# Altium PCB TSDM_2017.PcbDoc
Units mm, origin at the board's own origin, x right, y up, seen from the top; angles counter-clockwise.
Board outline 48 x 43 mm, 2 copper layers (Top Layer, Bottom Layer); 13 components, 15 nets, 36 pads, 7 vias.
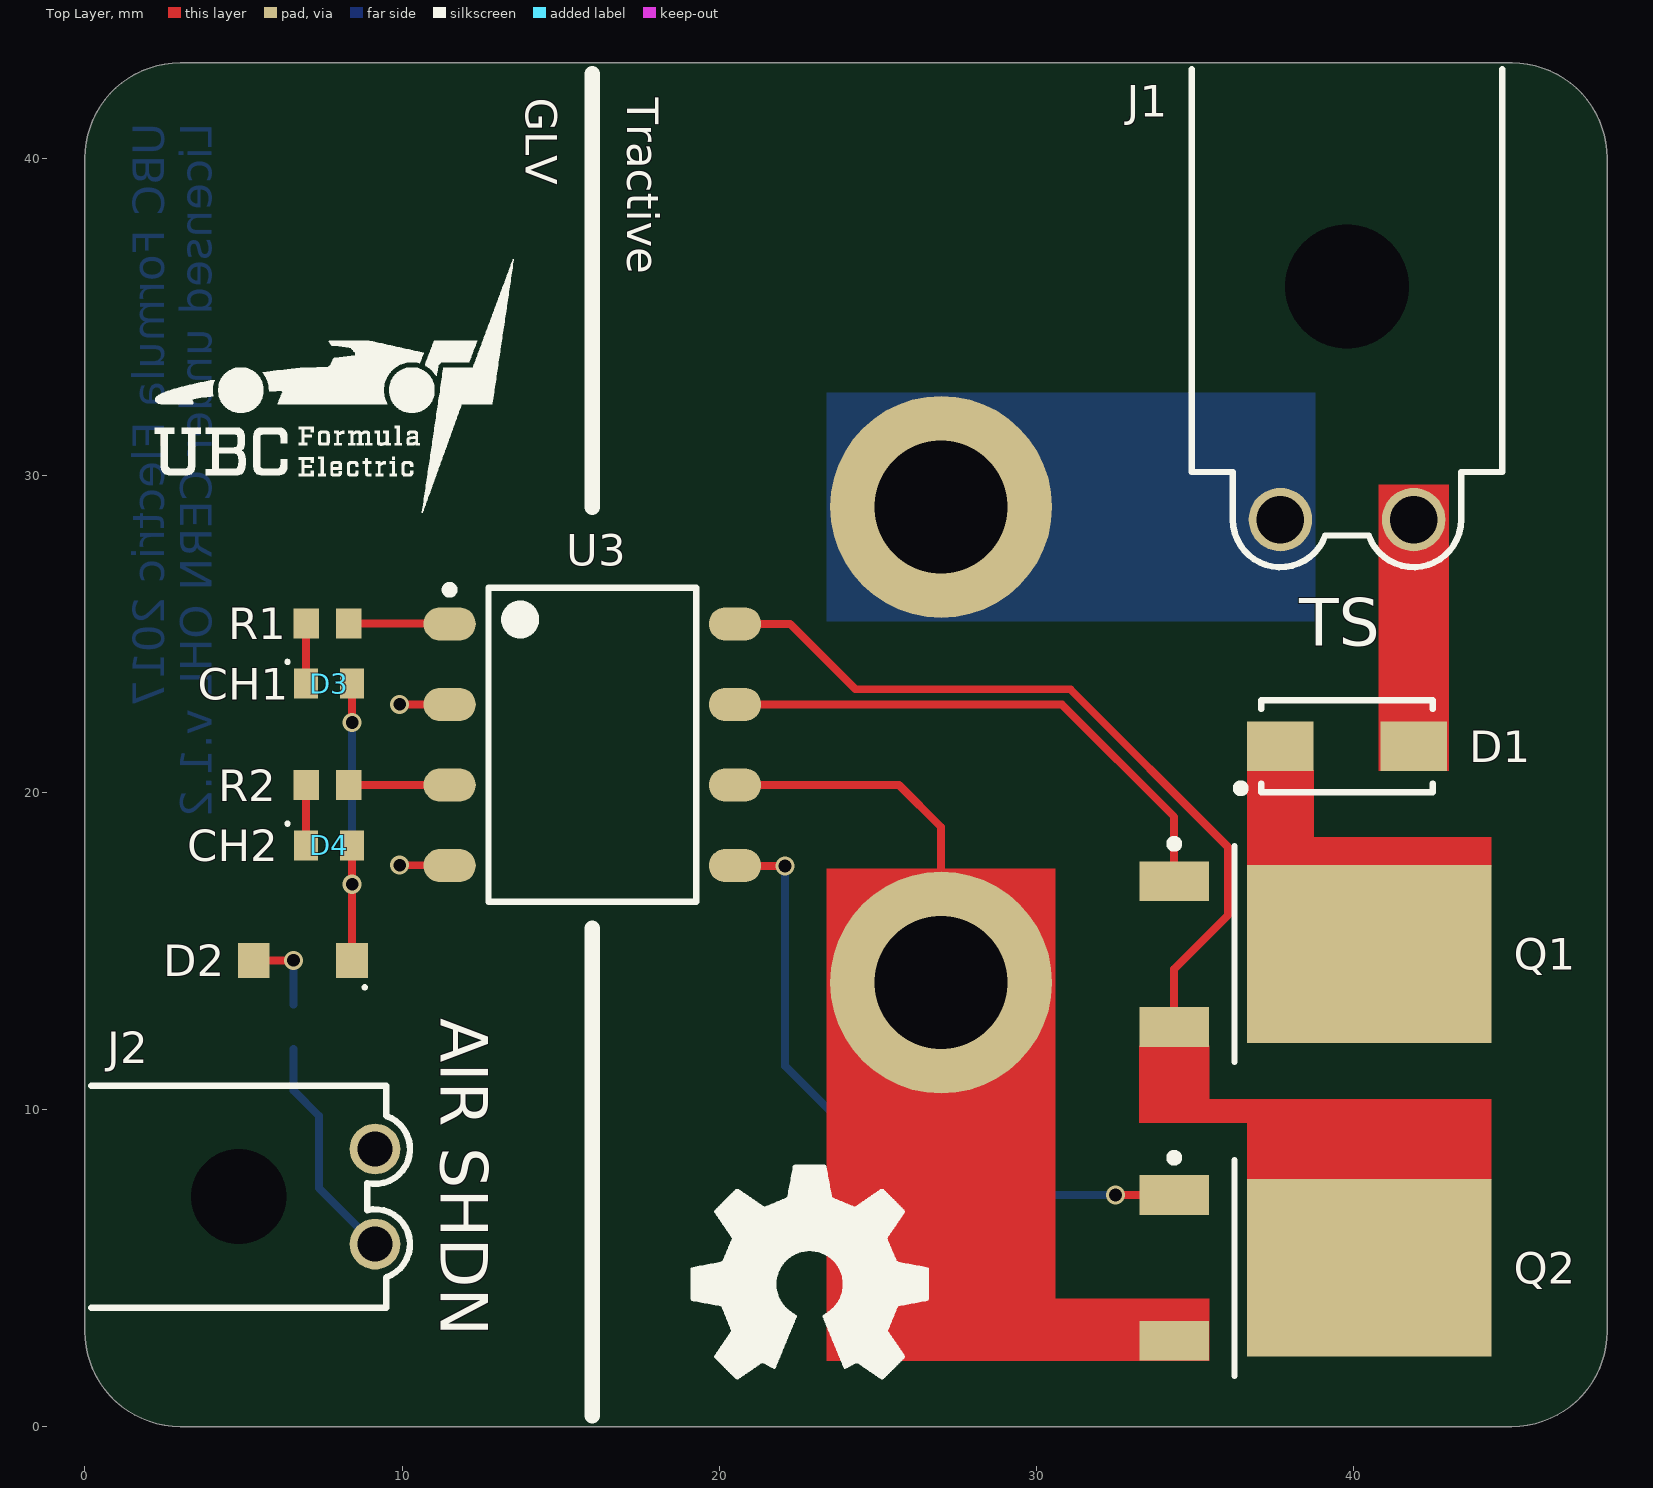
[diagram p0: Top Layer view]
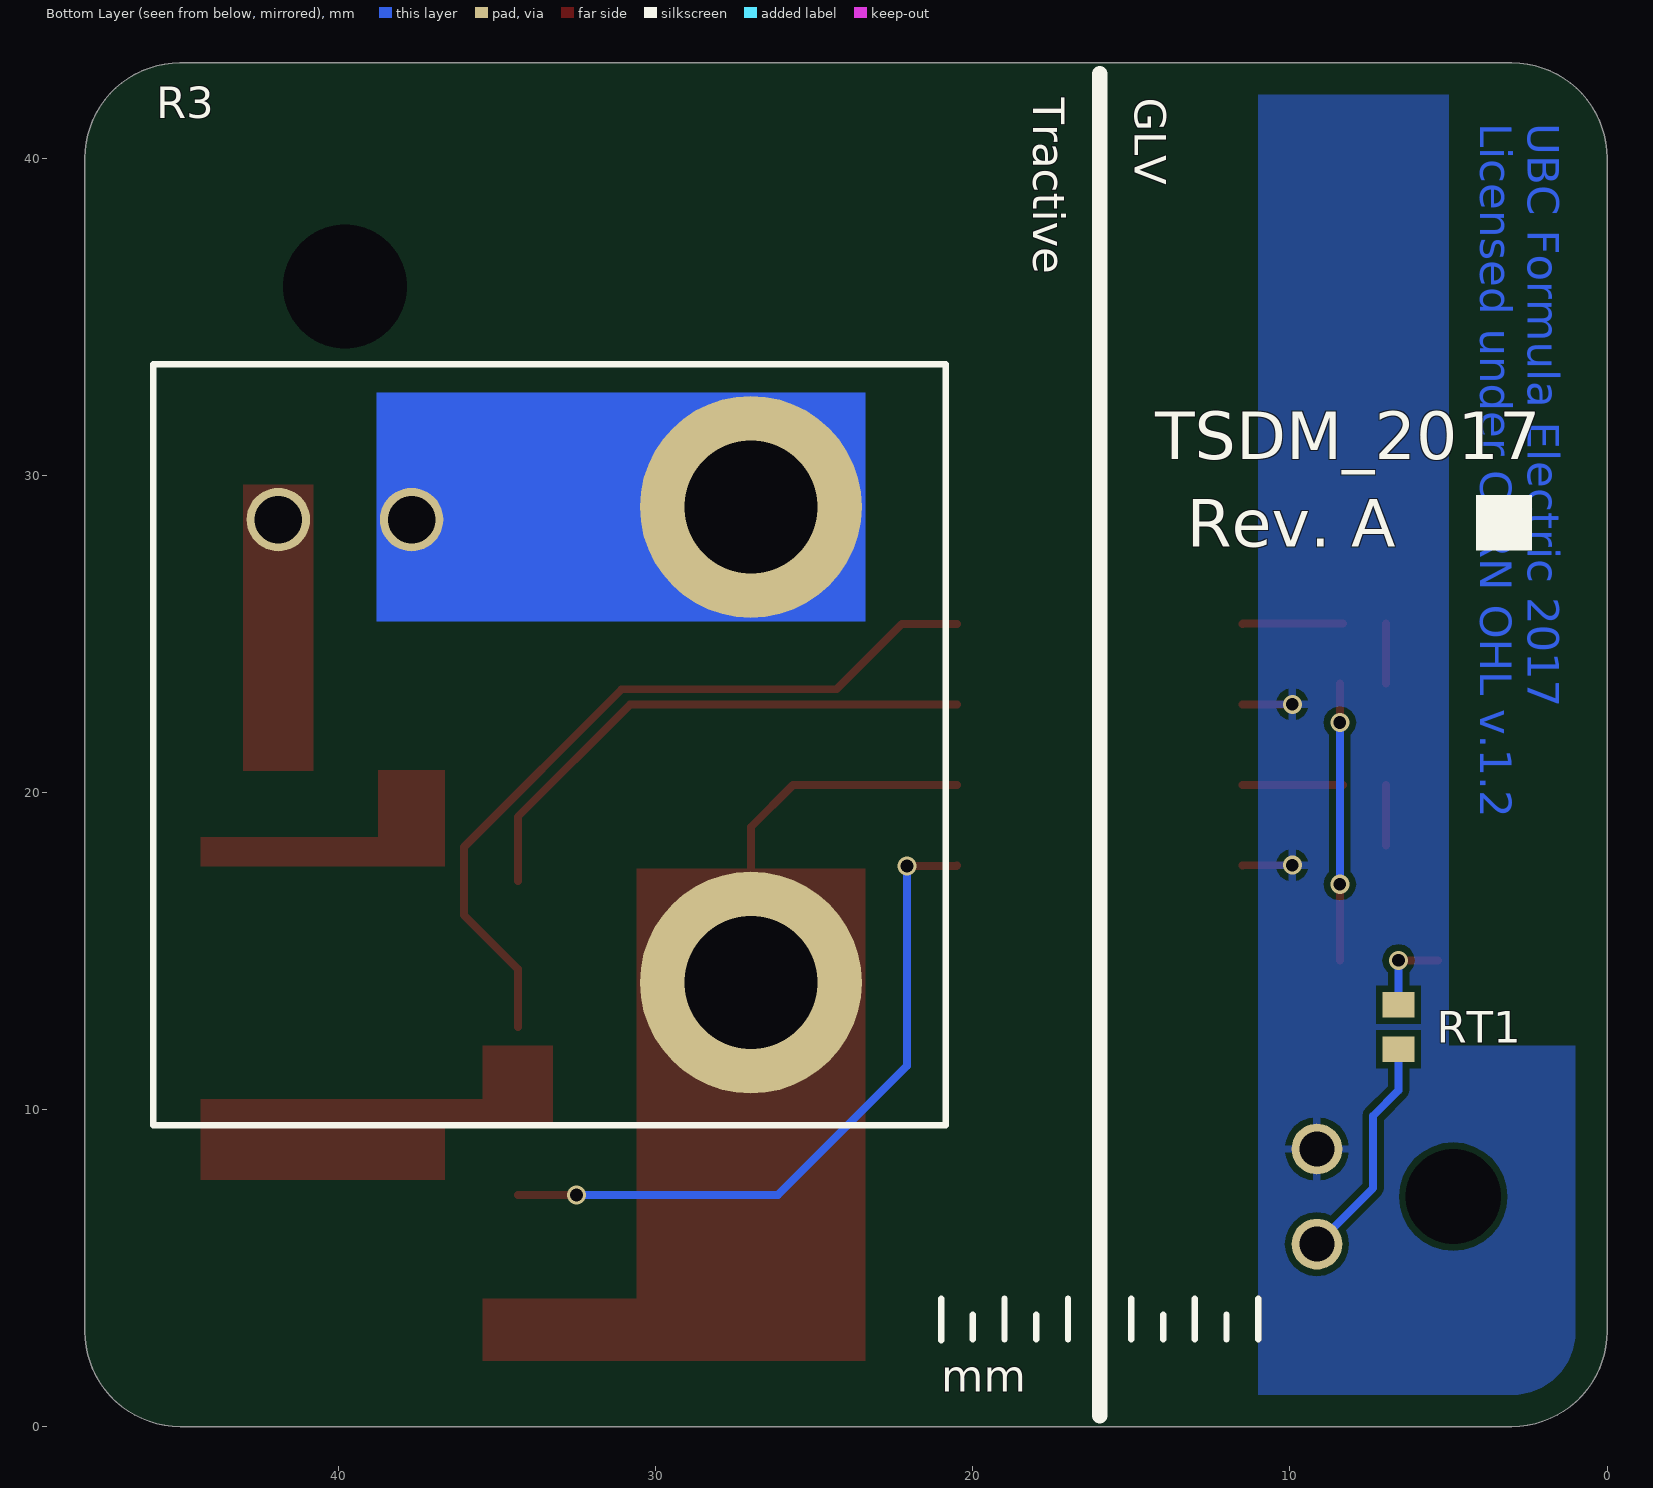
[diagram p1: Bottom Layer view, seen from below]

## Layer stack, top to bottom
Top Solder: solder mask 0.0102, Solder Resist, Dk 3.5
Top Layer: signal copper 0.0356
Dielectric2: dielectric 0.32, FR-4, Dk 4.8
Bottom Layer: signal copper 0.0356
Bottom Solder: solder mask 0.0102, Solder Resist, Dk 3.5

## Board outline
0,3 0,40 cw(c3,40) 3,43 45,43 cw(c45,40) 48,40 48,3 cw(c45,3) 45,0 3,0 cw(c3,3)

## Design rules (kind name [scope] priority, off if disabled: settings)
Clearance "Tractive System Clearance" [InNet('TS-') vs (InNet('TS+') OR InNet('NetD1_1') OR InNet('NetQ2_3'))] p1: gap=1.5 except(0.15: Arc-SMDPad SMDPad-SMDPad)
Clearance [All] p2: gap=0.15 except(0.2: Arc-Poly Track-Poly SMDPad-Poly THPad-Poly Via-Poly Fill-Poly Poly-Poly)
ComponentClearance [All] p1: gap=0.25 collisioncheckmode=3 verticalgap=0.25 showdistances=FALSE
DiffPairsRouting [All] p1: maxlimit=10 minlimit=0.2 mostfreqgap=0.25 toplayer_minwidth=0.2 toplayer_maxwidth=10 toplayer_prefwidth=0.25 bottomlayer_minwidth=0.2 bottomlayer_maxwidth=10 bottomlayer_prefwidth=0.25 maxuncoupledlength=12.7
Height [All] p1: minheight=0 maxheight=100 prefheight=0
HoleSize [All] p1: absolutevalues=TRUE maxlimit=10 minlimit=0.3 maxpercent=80.000 minpercent=20.000
HoleToHoleClearance [All] p1: gap=0.25 allowstackedmicrovias=TRUE
MinimumSolderMaskSliver [All] p1: minsoldermaskwidth=0.1
PlaneClearance [All] p1: clearance=0.5
PlaneConnect [All] p1: planeconnectstyle=Relief reliefexpansion=0.25 reliefentries=4 reliefconductorwidth=0.25 reliefairgap=0.25
PolygonConnect [All] p1: connectstyle=Relief reliefconductorwidth=0.25 reliefentries=4 polygonreliefangle="90 Angle" airgapwidth=0.2
RoutingCorners [All] p1: cornerstyle=45-Degree minsetback=2.5 maxsetback=2.5
RoutingVias [All] p1: holewidth=0.4 width=0.6 viastyle="Through Hole" minholewidth=0.3 minwidth=0.5 maxholewidth=1 maxwidth=1.5
SilkToSilkClearance [All] p1: silktosilkclearance=0.25
SilkToSolderMaskClearance [IsPad] p1: minsilkscreentomaskgap=0.1 clearancetoexposedcopper=TRUE
SolderMaskExpansion [All] p1: expansion=0.1
Width [All] p1: maxlimit=10 minlimit=0.2 preferedwidth=0.25 minimp=50.000000 maximp=50.000000 favimp=50.000000
19 further rules are at their usual default settings.

## Components (designator, comment, footprint, x,y, rotation, side; value= is the part's Value field where it differs from the comment)
D1 "STTH1R06" "STMicroelectronics STTH1R06 (SMA)" 39.8,21.45 r180 top locked
D2 "D Schottky" "NXP PMEG6020AELRX (SOD-123)" 6.875,14.7 r180 top locked
D3 "LTST-C193KGKT-5A" "Lite-On LTST-C193K-Series (1608)" 7.7,23.425 r180 top
D4 "LTST-C193KGKT-5A" "Lite-On LTST-C193K-Series (1608)" 7.7,18.325 r180 top
J1 "1-770966-0" "TE 1-770966-0" 39.8,33.8 r180 top locked
J2 "" "TE 2-1445055-2" 7,7.25 r270 top locked
Q1 "IXTY1R6N50D2" "IXYS IXTY1R6N50D2 (DPAK)" 38.8,14.9 r0 top locked
Q2 "IXTY1R6N50D2" "IXYS IXTY1R6N50D2 (DPAK)" 38.8,5 r0 top locked
R1 "" "PANASONIC ERJ-SERIES (1608)" 7.65,25.325 r180 top
R2 "" "PANASONIC ERJ-SERIES (1608)" 7.65,20.225 r180 top
R3 "Res2" "OHMITE TGH-SERIES (SOT-227)" 33.35,21.5 r90 bottom locked
RT1 "" "Bel Fuse 0ZCM-Series (1608)" 6.575,12.6 r90 bottom locked
U3 "ASSR-V621-302E" "Avago ASSR-V621-302E (8-SMD)" 16,21.5 r0 top locked

## Footprints (in the part's own frame and the unit in brackets; to place one, negate y for a bottom-side part, rotate by r counter-clockwise, add the part's x,y. Pads: shape width x height; smd on the part's side, far side on the other; paste and mask are expansions set on the pad)
"Avago ASSR-V621-302E (8-SMD)" [mm] "Dual Photovoltaic MOSFET Driver"
  oval 1.65x1.05 smd: 1(-4.5,3.81) 2(-4.5,1.27) 3(-4.5,-1.27) 4(-4.5,-3.81) 5(4.5,-3.81) 6(4.5,-1.27) 7(4.5,1.27) 8(4.5,3.81)
  silkscreen extent -4.62,-4.95 3.28,5.01, body extent -3.3,-4.95 3.3,4.95, height 3.7
"Bel Fuse 0ZCM-Series (1608)" [mm] "Chip PTC Fuse"
  rect 0.8x1 smd: 1(-0.7,0) 2(0.7,0)
  body extent -0.9,-0.5 0.9,0.5, height 0.76
"IXYS IXTY1R6N50D2 (DPAK)" [mm] "500V Depletion-Mode N-MOSFET"
  rect 2.2x1.25 smd: 1(-4.45,2.3) 3(-4.45,-2.3)
  rect 7.7x5.6 smd: 4(1.7,0)
  silkscreen extent -4.57,-3.4 -2.55,3.6, body extent -2.4,-3.37 3.85,3.37, height 2.4
"Lite-On LTST-C193K-Series (1608)" [mm] "Chip LED"
  rect 0.75x0.95 smd: 1(-0.725,0) 2(0.725,0)
  silkscreen extent 1.26,-0.74 1.36,-0.64, body extent -0.85,-0.45 0.85,0.45, height 0.35
"NXP PMEG6020AELRX (SOD-123)" [mm] "60V 2A Schottky Diode"
  rect 1x1.1 smd: 1(-1.55,0) 2(1.55,0)
  silkscreen extent -2,0.8 -1.9,0.9, body extent -1.4,-0.95 1.4,0.95, height 1.1
"OHMITE TGH-SERIES (SOT-227)" [mm] "Thick Film Power Resistor"
  round 7 hole 4.2: 1(-7.5,-6.35) 2(7.5,-6.35)
  silkscreen extent -12,-12.5 12,12.5, body extent -19.05,-12.45 19.05,12.45, height 12
"PANASONIC ERJ-SERIES (1608)" [mm] "Thick Film Chip Resistor"
  rect 0.8x0.95 smd: 1(-0.675,0) 2(0.675,0)
  body extent -0.8,-0.4 0.8,0.4, height 0.71
"STMicroelectronics STTH1R06 (SMA)" [mm] "600V 1A Diode"
  rect 2.1x1.55 smd: 1(-2.1,0) 2(2.1,0)
  silkscreen extent -2.7,-1.45 3.47,1.45, body extent -2.35,-1.45 2.35,1.45, height 2.64
"TE 1-770966-0" [mm] "Mini-Universal MATE-N-LOK 2-Pin Female Connector"
  round 2 hole 1.5: 1(-2.1,5.2) 2(2.1,5.2)
  round 0 hole 3.9: ""(0,-2.15)
  silkscreen extent -4.9,-9 4.9,6.7, body extent -6.22,-9 4.93,5.7, height 7.75
"TE 2-1445055-2" [mm] "Micro MATE-N-LOK 2-Pin Female Connector"
  round 1.6 hole 1.1: 1(1.5,2.15) 2(-1.5,2.15)
  round 0 hole 3: ""(0,-2.15)
  silkscreen extent -3.5,-6.8 3.5,3.25, body extent -5.07,-6.8 5.07,2.8, height 5.73

## Part data
D1: library part Diode, "Default Diode"
D2: "Schottky Diode"
D3 D4: library part LED0, "Typical INFRARED GaAs LED"
J1: library part "TE 1-770966-0", "Mini-Universal MATE-N-LOK 2-Pin Female Connector"
J2: library part "TE 2-1445055-2"
Q1 Q2: library part "IXYS IXTY1R6N50D2", "500V Depletion-Mode N-MOSFET"
R1 R2: library part Res2, "Resistor"
R3: "Resistor"
RT1: library part Thermistor, "Thermistor"
U3: library part "Avago ASSR-V621-302E_1_1", "Dual Photovoltaic MOSFET Driver"

## Via types
v1: diameter 0.6, hole 0.4, Top Layer to Bottom Layer, tented top, 7 vias

## Nets (pads, with @x,y where several pads share a name; then routed paths per layer and width w, separated by ;. In a path a pad name is that pad's centre, name@x,y a point inside that pad or via, vN(x,y) a via of type N, cw(c..) or ccw(c..) an arc to the next point about the centre after c; other vN are vias at no path point)
AIR_SHDN: D2.1 D3.1 D4.1 | length 10
  Top Layer w0.25: D2.1 v1(8.425,17.1) D4.1 ; v1(8.425,22.2) D3.1
  Bottom Layer w0.25: v1(8.425,17.1) v1(8.425,22.2)
GND: J2.2 U3.2 U3.4 | length 3.2
  Top Layer w0.25: v1(9.925,17.7) 11.49,17.7 U3.4 ; v1(9.925,22.775) 11.495,22.775 U3.2
NetD1_1: D1.1 J1.1
NetD2_1: D2.2 RT1.2 | length 2.7
  Top Layer w0.25: D2.2 v1(6.575,14.7)
  Bottom Layer w0.25: RT1.2 v1(6.575,14.7)
NetD3_2: D3.2 R1.2 | length 1.9
  Top Layer w0.25: D3.2 R1.2
NetD4_2: D4.2 R2.2 | length 1.9
  Top Layer w0.25: D4.2 R2.2
NetJ2_1: J2.1 RT1.1 | length 7.2
  Bottom Layer w0.25: RT1.1 6.575,10.6 7.375,9.8 7.375,7.525 J2.1
NetQ1_1: Q1.1 U3.7 | length 17.3
  Top Layer w0.25: U3.7 30.805,22.77 34.35,19.225 Q1.1
NetQ1_3: Q1.3 Q2.4 U3.8 | length 24.8
  Top Layer w0.25: U3.8 22.24,25.31 24.3,23.25 31.075,23.25 36.05,18.275 36.05,16.125 34.35,14.425 Q1.3
NetQ2_1: Q2.1 U3.5 | length 21.8
  Top Layer w0.25: U3.5 20.515,17.675 v1(22.075,17.675) ; v1(32.5,7.3) Q2.1
  Bottom Layer w0.25: v1(22.075,17.675) 22.075,11.375 26.15,7.3 v1(32.5,7.3)
NetQ2_3: Q2.3 R3.1 U3.6 | length 12
  Top Layer w0.25: U3.6 25.67,20.23 27,18.9 R3.1
NetR1_1: R1.1 U3.1 | length 3.2
  Top Layer w0.25: R1.1 11.485,25.325 U3.1
NetR2_1: R2.1 U3.3 | length 3.2
  Top Layer w0.25: R2.1 11.495,20.225 U3.3
TS+: D1.2 Q1.4
TS-: J1.2 R3.2
pads on no net: J1. J2.

## Polygon pours and split planes (outlines as drawn)
GND on Bottom Layer "GND Plane" (solid, pour order 4): 3,1 11,1 11,42 5,42 5,12 1,12 1,3 ccw(c3,3)

## Other copper
Top Layer:
  region net NetQ2_3: 35.45,2.075 23.4,2.075 23.4,17.588 30.6,17.588 30.6,4.025 35.45,4.025
  region net NetD1_1: 40.8,20.675 40.8,29.7 43,29.7 43,20.675
  region net NetQ1_3: 35.45,12 35.45,10.325 44.35,10.325 44.35,7.775 36.65,7.775 36.65,9.575 33.25,9.575 33.25,12
  region net TS+: 36.65,20.7 36.65,17.675 44.35,17.675 44.35,18.575 38.75,18.575 38.75,20.7
Bottom Layer:
  region net TS-: 23.4,32.6 23.4,25.4 38.8,25.4 38.8,32.6
  text "UBC Formula Electric 2017 / Licensed under CERN OHL v.1.2" at 4,41.1 h1 r90

## Silkscreen, mask and mechanical layers (free items; w line width, h text height)
Top Overlay:
  drawing of 3527 lines, arcs and shapes, not listed
  text "GLV" at 13.9,41.9 h1 r270
  text "Tractive" at 17.1,41.9 h1 r270
  text "TS" at 38.3,24.625 h1.5
  text "CH1" at 3.55,22.925 h1
  text "CH2" at 3.225,17.825 h1
  text "AIR SHDN" at 11.225,12.875 h1.5 r270
Bottom Overlay:
  region: 4.125,27.625 4.125,29.375 2.375,29.375 2.375,27.625
  lines w0.2: 11,2.75 11,4.025 ; 12,2.75 12,3.525 ; 13,2.75 13,4.025 ; 14,2.75 14,3.525 ; 15,2.75 15,4.025 ; 17,2.75 17,4.025 ; 18,2.75 18,3.525 ; 19,2.75 19,4.025 ; 20,2.75 20,3.525 ; 21,2.725 21,4.025
  lines w0.5: 16,0.35 16,42.65
  text "GLV" at 14.9,41.9 h1 r90
  text "Tractive" at 18.1,41.9 h1 r90
  text "TSDM_2017" at 14.25,30.5 h1.5
  text "Rev. A" at 13.25,27.75 h1.5
  text "mm" at 21,1.1 h1
Mechanical 1:
  the board outline again, w0.2